# Altium PCB NaviU.PcbDoc
Units mil, origin at the board's own origin, x right, y up, seen from the top; angles counter-clockwise.
Board outline 6000 x 4000 mil, 2 copper layers (Top Layer, Bottom Layer); 78 components, 49 nets, 337 pads, 25 vias.
Unrouted connection lines stored in the file: 202.
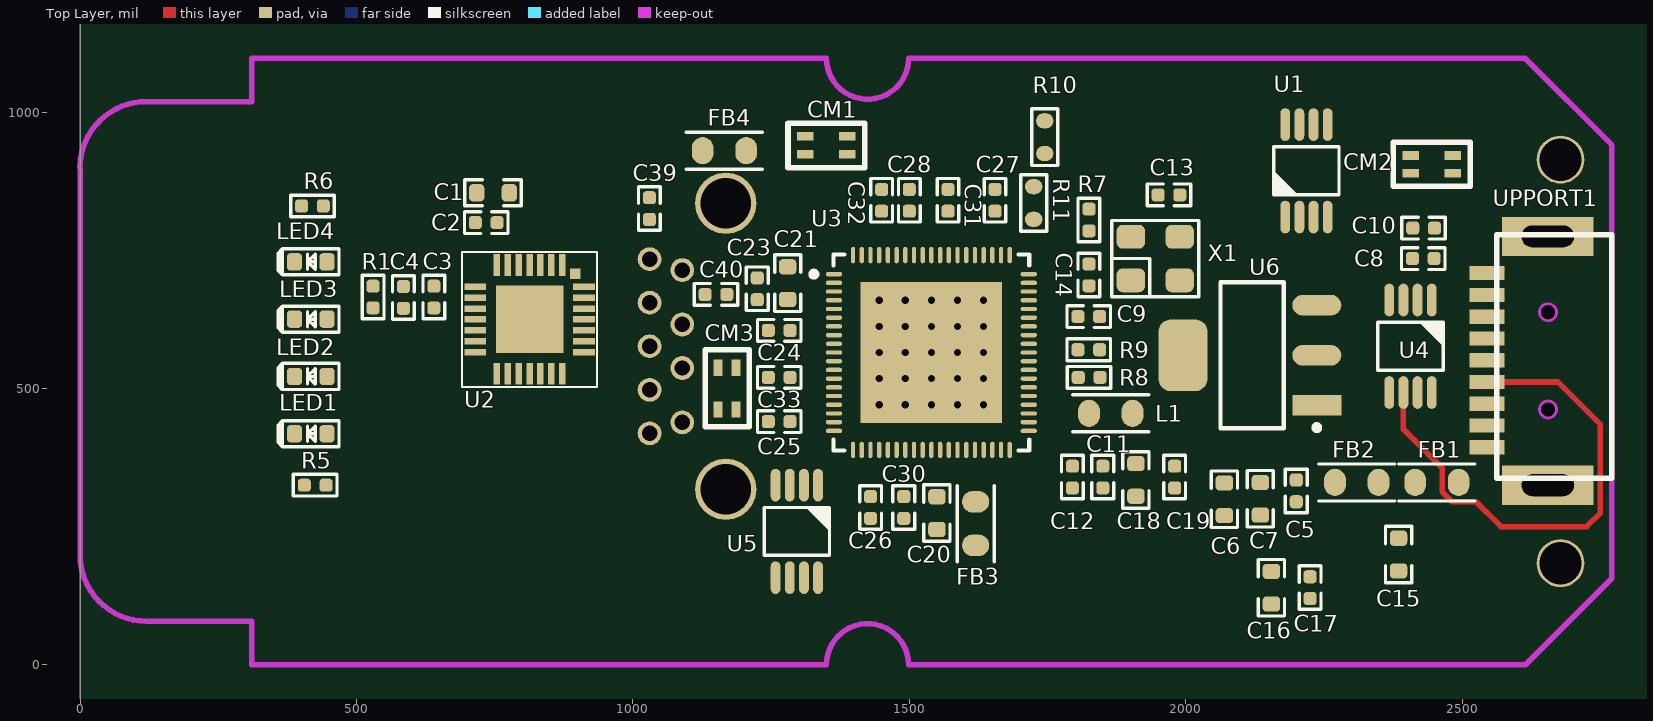
[diagram p0: Top Layer view]
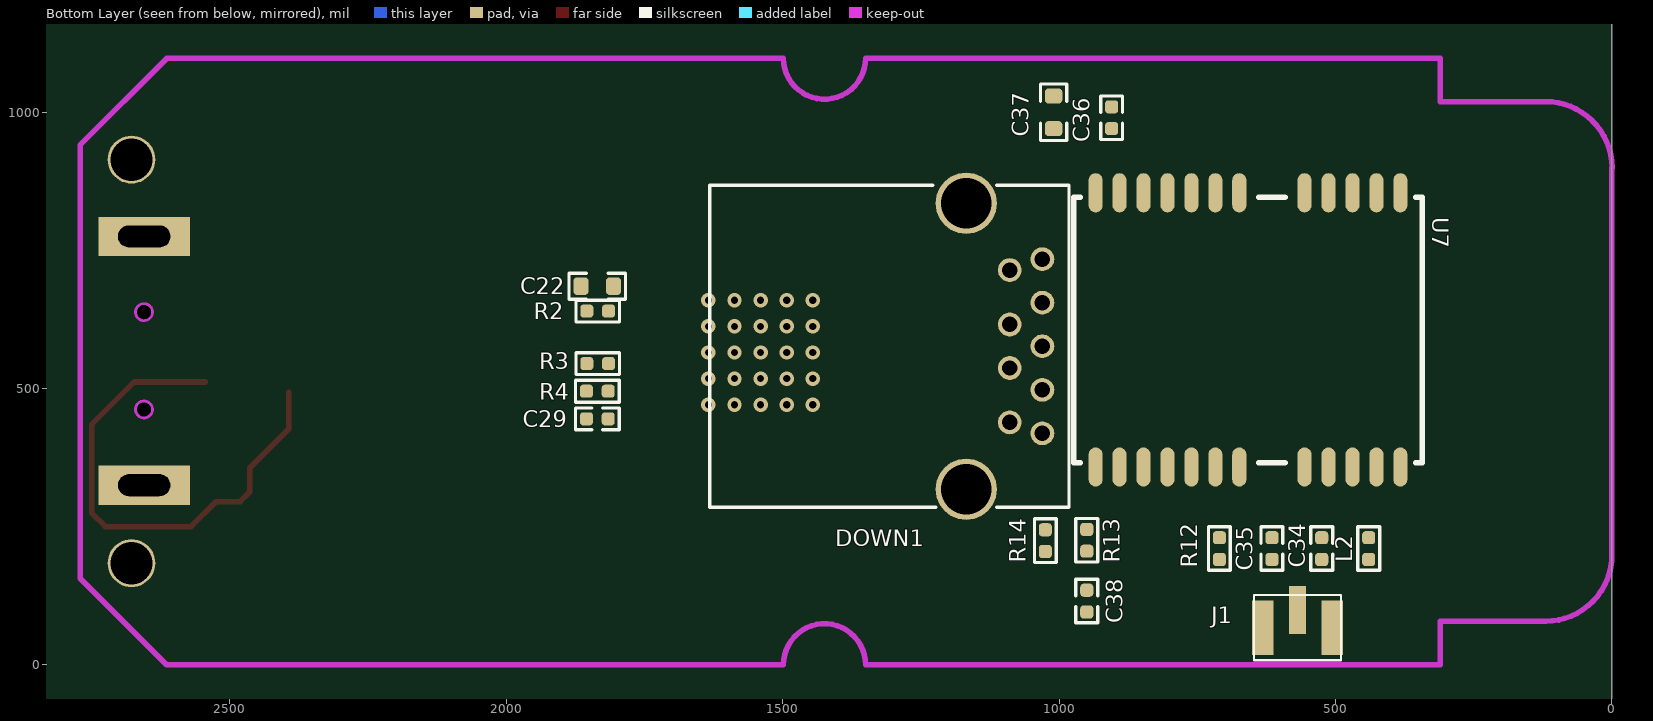
[diagram p1: Bottom Layer view, seen from below]

## Layer stack, top to bottom
Top Layer: signal copper 1.4
Dielectric: dielectric 12.6, FR-4, Dk 4.8
Bottom Layer: signal copper 1.4

## Board outline
0,-2127.35 6000,-2127.35 6000,1872.65 0,1872.65

## Design rules (kind name [scope] priority, off if disabled: settings)
Clearance [All] p1: gap=5
DiffPairsRouting [All] p1: maxlimit=10 minlimit=10 mostfreqgap=10 maxuncoupledlength=500
PolygonConnect [All] p1: connectstyle=Relief reliefconductorwidth=10 reliefentries=4 polygonreliefangle="90 Angle" airgapwidth=10
RoomDefinition "UM220 NEO-M8" [InComponentClass('UM220 NEO-M8')] p1: confinementstyle=ConfineIn formatcopy=TRUE lockcomponents=FALSE outline -1000,-3127.35 1000,-3127.35 1000,-2127.35 -1000,-2127.35
RoomDefinition GL3523 [InComponentClass('GL3523')] p2: confinementstyle=ConfineIn formatcopy=TRUE lockcomponents=FALSE outline -1000,-3127.35 1000,-3127.35 1000,-2127.35 -1000,-2127.35
RoomDefinition CP2102 [InComponentClass('CP2102')] p3: confinementstyle=ConfineIn formatcopy=TRUE lockcomponents=FALSE outline -1000,-3127.35 1000,-3127.35 1000,-2127.35 -1000,-2127.35
RoutingVias [All] p1: holewidth=28 width=50 viastyle="Through Hole" minholewidth=28 minwidth=50 maxholewidth=28 maxwidth=50
SilkscreenOverComponentPads [All] p1: minsilkscreentomaskgap=0
SolderMaskExpansion [All] p1: expansion=4
Width [All] p1: maxlimit=10 minlimit=10 preferedwidth=10
26 further rules are at their usual default settings.

## Classes and differential pairs
component class "UM220 NEO-M8": C34 C35 C36 C37 C38 J1 L2 R12 R13 R14 U7
component class GL3523: C5 C6 C7 C8 C9 C10 C11 C12 C13 C14 C15 C16 C17 C18 C19 C20 C21 C22 C23 C24 C25 C26 C27 C28 C29 C30 C31 C32 C33 C39 C40 CM2 CM3 DOWN1 FB1 FB2 FB3 FB4 L1 LED1 LED2 LED3 LED4 R2 R3 R4 R5 R6 R7 R8 R9 R10 R11 U3 U4 U5 U6 UPPORT1 X1
component class CP2102: C1 C2 C3 C4 CM1 R1 U1 U2
differential pair TX_UP: +TX_UP_P -TX_UP_N
differential pair RX_UP: +RX_UP_P -RX_UP_N

## Components (designator, comment, footprint, x,y, rotation, side; value= is the part's Value field where it differs from the comment)
C1 "C" 0603CAPC1608X09N 717.42,853.9 r0 top
C2 "C" 0402CAPC1005X06N 715,800 r0 top
C3 "15pF" 0402CAPC1005X06N 640,685 r270 top
C4 "C" 0402CAPC1005X06N 585,645 r90 top
C5 "C" 0402CAPC1005X06N 2200,295 r90 top
C6 "C" 0603CAPC1608X09N 2070,270 r90 top
C7 "C" 0603CAPC1608X09N 2135,330 r270 top
C8 "C" 0402CAPC1005X06N 2410,735 r0 top locked
C9 "15pF" 0402CAPC1005X06N 1805,630 r0 top
C10 "C" 0402CAPC1005X06N 2450,790 r180 top locked
C11 "C" 0402CAPC1005X06N 1850,320 r90 top
C12 "C" 0402CAPC1005X06N 1795,320 r90 top
C13 "15pF" 0402CAPC1005X06N 1950,850 r0 top
C14 "15pF" 0402CAPC1005X06N 1825,725 r270 top
C15 "C" 0603CAPC1608X09N 2385,170 r90 top
C16 "C" 0603CAPC1608X09N 2155,110 r90 top
C17 "C" 0402CAPC1005X06N 2225,120 r90 top
C18 "C" 0603CAPC1608X09N 1910,305 r90 top
C19 "C" 0402CAPC1005X06N 1980,320 r90 top
C20 "C" 0603CAPC1608X09N 1550,245 r90 top
C21 "C" 0603CAPC1608X09N 1280,720 r270 top
C22 "C" 0603CAPC1608X09N 1865,685 r180 bottom
C23 "C" 0402CAPC1005X06N 1225,700 r270 top
C24 "C" 0402CAPC1005X06N 1245,605 r0 top
C25 "C" 0402CAPC1005X06N 1245,440 r0 top
C26 "C" 0402CAPC1005X06N 1430,265 r90 top
C27 "C" 0402CAPC1005X06N 1655,860 r270 top
C28 "C" 0402CAPC1005X06N 1500,860 r270 top
C29 "C" 0402CAPC1005X06N 1855,445 r180 bottom
C30 "C" 0402CAPC1005X06N 1490,265 r90 top
C31 "C" 0402CAPC1005X06N 1570,860 r270 top
C32 "C" 0402CAPC1005X06N 1450,860 r270 top
C33 "C" 0402CAPC1005X06N 1245,520 r0 top
C34 "0.1uF" 0402CAPC1005X06N 525,190.63 r90 bottom
C35 "0.1uF" 0402CAPC1005X06N 615,190.63 r90 bottom
C36 "0.1uF" 0402CAPC1005X06N 905,970 r90 bottom
C37 "10uF" 0603CAPC1608X09N 1010,970 r90 bottom
C38 "0.1uF" 0402CAPC1005X06N 950,135 r270 bottom
C39 "C" 0402CAPC1005X06N 1030,845 r270 top
C40 "C" 0402CAPC1005X06N 1170,670 r180 top
CM1 "CM" SMD_4P 1420,980 r180 top
CM2 "CM" SMD_4P 2375,865 r0 top
CM3 "CM" SMD_4P 1130,570 r270 top
DOWN1 "USB3.0" USB3.0-A-Pin 985,285 r90 bottom locked
FB1 "FB" 0805FB 2415,330 r0 top
FB2 "FB" 0805FB 2270,330 r0 top
FB3 "FB" 0805FB 1620,295 r270 top
FB4 "FB" 0805FB 1205,930 r180 top
J1 "IPEX" IPEX 655,5 r180 bottom
L1 "L" 0805FB 1825,455 r0 top
L2 "68nH" 0402RESC1005X04N 440,190.63 r90 bottom
LED1 "GREEN" 0603LEDC1608X04N 417.32,418 r180 top
LED2 "AMBER" 0603LEDC1608X04N 417.32,521.67 r180 top
LED3 "GREEN" 0603LEDC1608X04N 417.32,625.33 r180 top
LED4 "AMBER" 0603LEDC1608X04N 417.32,729 r180 top
R1 "4K7" 0402RESC1005X04N 530,685 r270 top
R2 "100K" 0402RESC1005X04N 1815,640 r0 bottom
R3 "20K%1" 0402RESC1005X04N 1815,545 r0 bottom
R4 "10K" 0402RESC1005X04N 1855,495 r180 bottom
R5 "680R" 0402RESC1005X04N 445,325 r180 top
R6 "680R" 0402RESC1005X04N 440,830 r180 top
R7 "1M" 0402RESC1005X04N 1825,785 r90 top
R8 "10K" 0402RESC1005X04N 1845,520 r180 top
R9 "39K" 0402RESC1005X04N 1805,570 r0 top
R10 "R" 0603R 1745,925 r90 top
R11 "R" 0603R 1725,865 r270 top
R12 "NC(0R)" 0402RESC1005X04N 710,230 r270 bottom
R13 "0R" 0402RESC1005X04N 950,245 r270 bottom
R14 "22K" 0402RESC1005X04N 1025,205 r90 bottom
U1 "AZ1065-06Q" MSOP-8 2180,810 r90 top
U2 "CP2102" QFN-28 935,745 r180 top
U3 "GL3523" QFN-76 1540,565 r0 top locked
U4 "AZ1065-06Q" MSOP-8 2445,660 r270 top
U5 "AZ1065-06Q" MSOP-8 1335,325 r270 top
U6 "AP7361-SOT223" SOT230P700X180-4N 2120,560 r180 top
U7 "NEO-M8N" UM220 975,845 r270 bottom locked
UPPORT1 "USB3.0" USB3.0-G 2600,550 r180 top
X1 "25MHz" CPX-32 1945,735 r0 top

## Footprints (in the part's own frame and the unit in brackets; to place one, negate y for a bottom-side part, rotate by r counter-clockwise, add the part's x,y. Pads: shape width x height; smd on the part's side, far side on the other; paste and mask are expansions set on the pad)
0402CAPC1005X06N [mm] "0402 Chip Capacitor, 2-Leads, Body 1.0x0.5mm, IPC Medium Density"
  rrect50% 0.6x0.6 smd: 1(0,0) 2(1,0)
  silkscreen extent -0.5,-0.5 1.5,0.5, body extent -0.05,-0.3 1.05,0.3, height 0.6
0402RESC1005X04N [mm] "0402 Chip Resistor, 2-Leads, Body 1.0x0.5mm, IPC Medium Density"
  rrect50% 0.6x0.6 smd: 1(0,0) 2(1,0)
  silkscreen extent -0.5,-0.5 1.5,0.5, body extent -0.03,-0.33 1.02,0.32, height 0.36
0603CAPC1608X09N [mm] "0603 Chip Capacitor, 2-Leads, Body 1.6x0.8mm, IPC Medium Density"
  rrect50% 0.7x0.8 smd: 1(0,0) 2(1.5,0)
  silkscreen extent -0.55,-0.6 2.05,0.6, body extent -0.13,-0.48 1.63,0.48, height 0.9
0603LEDC1608X04N [mm] "SMD LED, 2-Leads, Body 1.6x0.8mm, IPC Medium Density"
  rrect50% 0.7x0.8 smd: A(-0.75,0) K(0.75,0)
  silkscreen extent -1.3,-0.6 1.5,0.6, body extent -0.8,-0.4 0.8,0.4, height 0.4
0603R [mm]
  oval 0.7x0.8 smd: 1(0,0) 2(1.5,0)
  silkscreen extent -0.55,-0.6 2.05,0.6
0805FB [mm]
  oval 1x1.25 smd: 1(0,0) 2(2,0)
  silkscreen extent -0.75,-0.85 2.75,0.85
CPX-32 [mm]
  rrect50% 1.3x1.1 smd: 1(-1.125,-1) 2(1.125,-1) 3(1.125,1) 4(-1.125,1)
  silkscreen extent -2,-1.75 2,1.75, body extent -1.6,-1.25 1.6,1.25, height 1
IPEX [mm]
  round 0.01 on Bottom Overlay: 0(2.19,1.586)
  rect 1x2.5 smd: G(0.59,1.586) G(3.79,1.586)
  rect 0.8x2.2 smd: S(2.19,2.386)
  silkscreen extent 0.19,0.09 4.19,3.09
MSOP-8 [mm]
  oval 1.5x0.45 smd: 1(0,0) 2(0,-0.65) 3(0,-1.3) 4(0,-1.95) 5(4.25,-1.95) 6(4.25,-1.3) 7(4.25,-0.65) 8(4.25,0)
  round 0.3 on Top Overlay: ""(0,0.5)
  silkscreen extent 1.02,-2.48 3.22,0.52
QFN-28 [mm]
  rect 0.5x0.5 smd: 0(0.995,0.951)
  rect 3.1x3.1 smd: 0(3.095,3.051)
  rect 0.3x1 smd: 1(1.595,0.551) 2(2.095,0.551) 3(2.595,0.551) 4(3.095,0.551) 5(3.595,0.551) 6(4.095,0.551) 7(4.595,0.551) 15(4.595,5.551) 16(4.095,5.551) 17(3.595,5.551) 18(3.095,5.551) 19(2.595,5.551) 20(2.095,5.551) 21(1.595,5.551)
  rect 1x0.3 smd: 8(5.595,1.551) 9(5.595,2.051) 10(5.595,2.551) 11(5.595,3.051) 12(5.595,3.551) 13(5.595,4.051) 14(5.595,4.551) 22(0.595,4.551) 23(0.595,4.051) 24(0.595,3.551) 25(0.595,3.051) 26(0.595,2.551) 27(0.595,2.051) 28(0.595,1.551)
  silkscreen extent 0,-0.05 6.19,6.15
QFN-76 [mm] "QFN, 76-Leads, Body 9.0x9.0mm (max), Pitch 0.40mm, IPC Medium Density"
  oval 0.75x0.2 smd: 1(-4.475,3.6) 2(-4.475,3.2) 3(-4.475,2.8) 4(-4.475,2.4) 5(-4.475,2) 6(-4.475,1.6) 7(-4.475,1.2) 8(-4.475,0.8) 9(-4.475,0.4) 10(-4.475,0) 11(-4.475,-0.4) 12(-4.475,-0.8) 13(-4.475,-1.2) 14(-4.475,-1.6) 15(-4.475,-2) 16(-4.475,-2.4) 17(-4.475,-2.8) 18(-4.475,-3.2) 19(-4.475,-3.6) 39(4.475,-3.6) 40(4.475,-3.2) 41(4.475,-2.8) 42(4.475,-2.4) 43(4.475,-2) 44(4.475,-1.6) 45(4.475,-1.2) 46(4.475,-0.8) 47(4.475,-0.4) 48(4.475,0) 49(4.475,0.4) 50(4.475,0.8) 51(4.475,1.2) 52(4.475,1.6) 53(4.475,2) 54(4.475,2.4) 55(4.475,2.8) 56(4.475,3.2) 57(4.475,3.6)
  oval 0.2x0.75 smd: 20(-3.6,-4.475) 21(-3.2,-4.475) 22(-2.8,-4.475) 23(-2.4,-4.475) 24(-2,-4.475) 25(-1.6,-4.475) 26(-1.2,-4.475) 27(-0.8,-4.475) 28(-0.4,-4.475) 29(0,-4.475) 30(0.4,-4.475) 31(0.8,-4.475) 32(1.2,-4.475) 33(1.6,-4.475) 34(2,-4.475) 35(2.4,-4.475) 36(2.8,-4.475) 37(3.2,-4.475) 38(3.6,-4.475) 58(3.6,4.475) 59(3.2,4.475) 60(2.8,4.475) 61(2.4,4.475) 62(2,4.475) 63(1.6,4.475) 64(1.2,4.475) 65(0.8,4.475) 66(0.4,4.475) 67(0,4.475) 68(-0.4,4.475) 69(-0.8,4.475) 70(-1.2,4.475) 71(-1.6,4.475) 72(-2,4.475) 73(-2.4,4.475) 74(-2.8,4.475) 75(-3.2,4.475) 76(-3.6,4.475)
  rect 6.5x6.5 smd: 77(0,0)
  silkscreen extent -5.52,-4.5 4.5,4.5, body extent -4.5,-4.5 4.5,4.5, height 0.8
SMD_4P [mm] "ACM2012E-900-2P-T01"
  rect 0.75x0.4 smd: 1(0.821,1.433) 2(0.821,0.611) 3(2.746,0.611) 4(2.746,1.433)
  silkscreen extent 0.01,0.01 3.54,2.04
SOT230P700X180-4N [mm] "SOT223, 4-Leads, Body 6.7x7.3mm (max), Pitch 2.30mm, IPC Medium Density"
  rect 2.25x0.95 smd: 1(-2.975,2.3)
  oval 2.25x0.95 smd: 2(-2.975,0) 3(-2.975,-2.3)
  rrect50% 2.25x3.3 smd: 2(3.175,0)
  silkscreen extent -3.1,-3.35 1.45,3.45, body extent -1.85,-3.35 1.85,3.35, height 1.8
UM220 [mm]
  oval 1.8x0.65 smd: 1(12.374,1.043) 2(12.374,2.143) 3(12.374,3.243) 4(12.374,4.343) 5(12.374,5.443) 6(12.374,6.543) 7(12.374,7.643) 8(12.374,10.643) 9(12.374,11.743) 10(12.374,12.843) 11(12.374,13.943) 12(12.374,15.043) 13(-0.226,15.043) 14(-0.226,13.943) 15(-0.226,12.843) 16(-0.226,11.743) 17(-0.226,10.643) 18(-0.226,7.643) 19(-0.226,6.543) 20(-0.226,5.443) 21(-0.226,4.343) 22(-0.226,3.243) 23(-0.226,2.143) 24(-0.226,1.043)
  round 0.381 on Bottom Overlay: ""(13.774,1.043)
  silkscreen extent -0.03,0.04 12.17,16.04
USB3.0-A-Pin [mil]
  round 43 hole 28: 1(429.13,104.33) 2(330.71,104.33) 3(251.97,104.33) 4(153.54,104.33) 5(133.86,45.28) 6(212.6,45.28) 7(291.34,45.28) 8(370.08,45.28) 9(448.82,45.28)
  round 111 hole 91: G1(550,183.07) G2(32.68,183.07)
  silkscreen extent 0,-3 583,647
USB3.0-G [mm]
  rect 4.2x1.8 hole 1 slot 2.4 at 0 deg: 0(-1.397,5.715) 0(-1.397,-5.715)
  rect 1.6x0.65 smd: 1(1.397,-3.026) 2(1.397,-1.026) 3(1.397,0.974) 4(1.397,2.974) 5(1.397,3.974) 6(1.397,1.974) 7(1.397,-0.026) 8(1.397,-2.026) 9(1.397,-4.026)
  Keep-Out Layer circle w0.127: c-1.406,-2.235 r0.39
  Keep-Out Layer circle w0.127: c-1.406,2.235 r0.39
  silkscreen extent -4.34,-5.79 0.94,5.4

## Part data
C3 C9 C13 C14 C34 C35 C36 C37 C38: library part C, "C"
CM1 CM2 CM3: "USB Comon Choke"
J1: library part "RF Connector", "RF Connector"
L2: library part L, "L"
LED1 LED2 LED3 LED4: library part LED, "Chip LED"
R1 R2 R3 R4 R5 R6 R7 R8 R9 R12 R13 R14: library part R, "R"
U2: library part CP2101/2
U6: library part AMS1117-3.3
UPPORT1: library part U
X1: library part CRYSTAL-4

## Free pads (board coordinates)
  round 30.71 hole 30.71: 0(2656,460) 0(2656,637)
  round 86.61 hole 76.77: 0(2677.95,184) 0(2677.95,913.92)

## Via types
v1: diameter 25.98, hole 12.99, Top Layer to Bottom Layer, tented top, 25 vias

## Nets (pads, with @x,y where several pads share a name; then routed paths per layer and width w, separated by ;. In a path a pad name is that pad's centre, name@x,y a point inside that pad or via, vN(x,y) a via of type N, cw(c..) or ccw(c..) an arc to the next point about the centre after c; other vN are vias at no path point)
3.3V: C1.2 R1.1 U2.6
AMBER1: LED2.K U3.75
AMBER2: LED4.K U3.30
AVDD33: C22.2 C29.2 C30.2 C31.2 C32.2 C33.2 U3.12 U3.27 U3.44 U3.55 U3.65 U3.73
DM0: CM2.2 CM2.3 U3.67 U4.5 UPPORT1.2
DM1: CM1.1 CM1.4 U1.6 U2.5 U3.64
DM2: CM3.1 CM3.4 DOWN1.2 U3.26 U5.6
DP0: CM2.1 CM2.4 U3.66 U4.6 UPPORT1.3 | length 928.1
  Top Layer w10: U4.6 2393.82,426.18 2464.06,355.94 2464.06,312.78 2481.44,295.39 2524.61,295.39 2570,250 2725,250 2750,275 2750,435 2673.33,511.67 UPPORT1.3
DP1: CM1.2 CM1.3 U1.5 U2.4 U3.63
DP2: CM3.2 CM3.3 DOWN1.3 U3.25 U5.5
DVDD12_1: C11.2 C12.2 C18.2 C19.2 C20.2 FB3.1 L1.2 U3.28 U3.39 U3.47
GND: C1.1 C2.1 C3.2 C4.1 C5.1 C6.1 C7.2 C9.2 C11.1 C12.1 C13.1 C14.2 C15.1 C16.1 C17.1 C18.1 C19.1 C20.1 C21.1 C22.1 C23.1 C24.1 C25.1 C26.1 C27.1 C28.1 C29.1 C30.1 C31.1 C32.1 C33.1 C34.2 C35.2 C36.2 C37.2 C38.2 DOWN1.4 DOWN1.7 J1.G R2.2 R3.2 R5.2 R6.2 R9.2 R11.1 U1.7 U2.3 U3.40 U4.7 U5.7 U6.1 U7.10 U7.12 U7.13 U7.24 UPPORT1.4 UPPORT1.7 X1.2 X1.4
GREEN1: LED1.K U3.74
GREEN2: LED3.K U3.29
NetC16_2: C16.2 C17.2 FB2.2 U6.3
NetC38_1: C38.1 R12.2 R13.2 R14.1
NetDOWN1_1: DOWN1.1 FB4.2
NetFB1_2: FB1.2 UPPORT1.1
NetJ1_S: J1.S L2.2 U7.11
NetLED1_A: LED1.A LED2.A R5.1
NetLED3_A: LED3.A LED4.A R6.1
NetR4_2: R4.2 U3.45
NetR12_1: R12.1 U7.8
NetR13_1: R13.1 U7.1
NetU2_25: U2.25 U7.21
NetU2_26: U2.26 U7.20
PGANG: R2.1 U3.53
RESET: C9.1 R8.2 R9.1 U3.48
RST1: R1.2 U2.9
RTERM: R3.1 U3.46
RX_UP_N: U3.71 U4.2 UPPORT1.8
RX_UP_P: U3.72 U4.1 UPPORT1.9
RXN_DS2: DOWN1.5 U3.23 U5.2
RXP_DS2: DOWN1.6 U3.24 U5.1
SW: L1.1 U3.41
TX_DS2_N: C40.1 U3.20
TX_DS2_P: C39.1 U3.21
TX_UP_N: C8.1 U3.68
TX_UP_P: C10.1 U3.69
TXNE_DS2: C40.2 DOWN1.8 U5.4
TXNE_UP: C8.2 U4.4 UPPORT1.5
TXPE_DS2: C39.2 DOWN1.9 U5.3
TXPE_UP: C10.2 U4.3 UPPORT1.6
V33: C34.1 C35.1 C36.1 C37.1 L2.1 R4.1 R14.2 U6.2 U7.23
VBUS: C2.2 C3.1 C4.2 C5.2 C6.2 C7.1 C15.2 FB1.1 FB2.1 FB4.1 R8.1 R10.2 U1.8 U2.7 U2.8 U3.42 U3.43 U4.8 U5.8
VBUS_IN: R10.1 R11.2 U3.54
VP12_01: C21.2 C23.2 C24.2 C25.2 C26.2 C27.2 C28.2 FB3.2 U3.4 U3.7 U3.17 U3.22 U3.60 U3.70
X1: C13.2 R7.2 U3.57 X1.3
X2: C14.1 R7.1 U3.56 X1.1
pads on no net: DOWN1.G1 DOWN1.G2 J1.0 U1. U1.1 U1.2 U1.3 U1.4 U2.0 U2.1 U2.2 U2.10 U2.11 U2.12 U2.13 U2.14 U2.15 U2.16 U2.17 U2.18 U2.19 U2.20 U2.21 U2.22 U2.23 U2.24 U2.27 U2.28 U3.1 U3.2 U3.3 U3.5 U3.6 U3.8 U3.9 U3.10 U3.11 U3.13 U3.14 U3.15 U3.16 U3.18 U3.19 U3.31 U3.32 U3.33 U3.34 U3.35 U3.36 U3.37 U3.38 U3.49 U3.50 U3.51 U3.52 U3.58 U3.59 U3.61 U3.62 U3.76 U3.77 U4. U5. U7. U7.2 U7.3 U7.4 U7.5 U7.6 U7.7 U7.9 U7.14 U7.15 U7.16 U7.17 U7.18 U7.19 U7.22 UPPORT1.0
copper on no net:
  other v1: 1445.51,470.51 1492.76,470.51 1540,470.51 1587.24,470.51 1634.49,470.51 1445.51,517.76 1492.76,517.76 1540,517.76 1587.24,517.76 1634.49,517.76 1445.51,565 1492.76,565 1540,565 1587.24,565 1634.49,565 1445.51,612.24 1492.76,612.24 1540,612.24 1587.24,612.24 1634.49,612.24 1445.51,659.49 1492.76,659.49 1540,659.49 1587.24,659.49 1634.49,659.49

## Keep-outs
Keep-Out Layer:
  lines w10: -0.27,899 cw(c120.37,898.37) 121,1019 ; 0,899 0,200 ccw(c120.63,199.37) 120,78.73 310.24,78.73 310.24,-0.01 1350,-0.01 cw(c1424.41,-0.01) 1498.82,-0.01 2614.17,-0.01 2770.87,156.69 2770.87,158.3 2770.87,939.78 2770.87,940.3 2614.17,1096.99 1498.82,1096.99 cw(c1424.41,1097.64) 1350,1097.64 310.24,1097.65 310.24,1018.92 121,1018.92